# EAGLE board Pixelkit_2side (EAGLE 5.08)
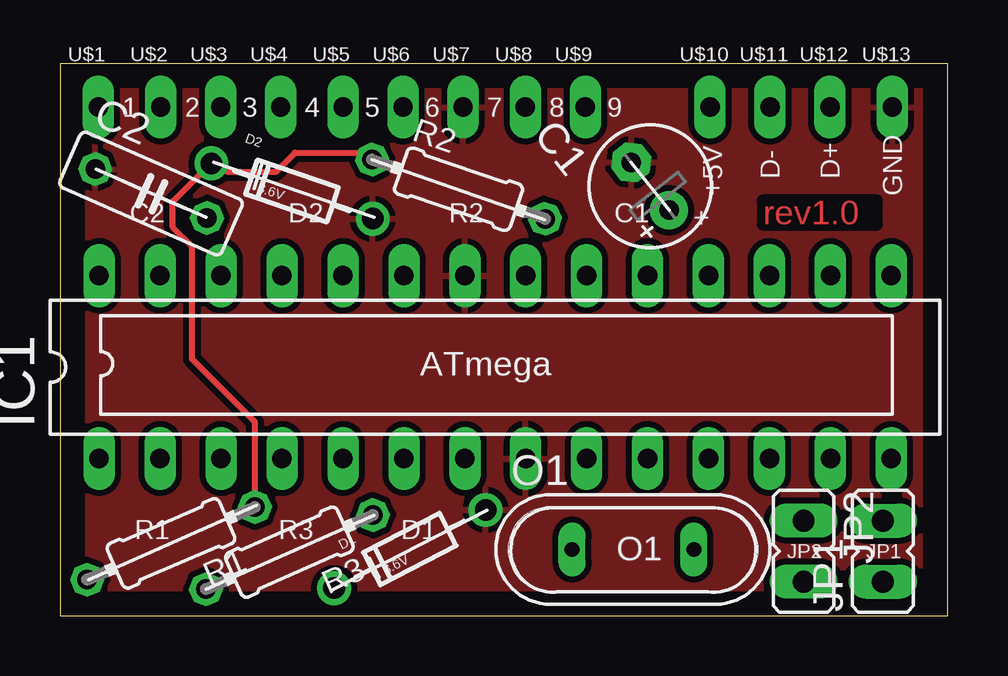
[diagram p0: board, top side]
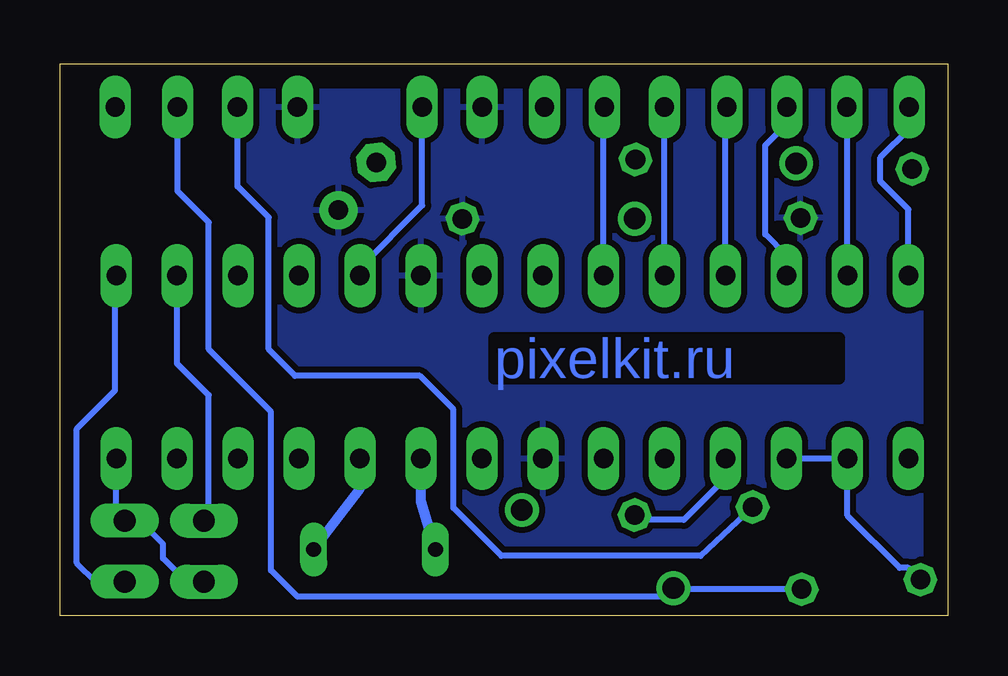
[diagram p1: board, bottom side, seen from below]

Size 37 x 23 mm. Coordinates in mm from the lower left corner, seen from the top.
Outline: 0,0 37,0 37,23 0,23 0,0
Copper layers (1*16): Top 0.035mm / dielectric 1.5mm / Bottom 0.035mm
Design rules "default": minimum track width 10mil, minimum drill 24mil, track to track 8mil, track to pad 8mil, pad to pad 8mil, via to via 8mil, smd to smd 8mil, copper to edge 40mil, drill to drill 8mil, minimum pad ring 10mil, minimum via ring 8mil, stop-mask expansion 4mil, vias tented up to drill 0mil, thermal gap 10mil
Net classes: 0 default: width 0.25 mm, clearance 0.125 mm; 1 power line: width 0.5 mm, clearance 0.25 mm

## Footprints (pad centres in the part's own frame; a part is rotated, then mirrored left to right if it is on the bottom)
E2,5-5 = drill 0.813 pad 1.6 round: + -1.27,0 | drill 0.813 pad 1.6 octagon: - 1.27,0
C050-025X075 = drill 0.813 octagon: 1 -2.54,0; 2 2.54,0
DIODE-ZENER = drill 0.9 round: P$1 -3.556,0; P$2 3.556,0
DIL28-3 = drill 0.813 long: 1 -16.51,-3.81; 2 -13.97,-3.81; 3 -11.43,-3.81; 4 -8.89,-3.81; 5 -6.35,-3.81; 6 -3.81,-3.81; 7 -1.27,-3.81; 8 1.27,-3.81; 9 3.81,-3.81; 10 6.35,-3.81; 11 8.89,-3.81; 12 11.43,-3.81; 13 13.97,-3.81; 14 16.51,-3.81; 15 16.51,3.81; 16 13.97,3.81; 17 11.43,3.81; 18 8.89,3.81; 19 6.35,3.81; 20 3.81,3.81; 21 1.27,3.81; 22 -1.27,3.81; 23 -3.81,3.81; 24 -6.35,3.81; 25 -8.89,3.81; 26 -11.43,3.81; 27 -13.97,3.81; 28 -16.51,3.81
JP1 = drill 0.914 long: 1 0,-1.27; 2 0,1.27
QS = drill 0.61 long: 1 -2.54,0; 2 2.54,0
0204/7 = drill 0.813 octagon: 1 -3.81,0; 2 3.81,0
PERF_PAD = drill 0.8 long: PP1 0,0

## Placement (x,y rotation side)
C1  10uF  [E2,5-5]  24.6,17.9 128.3 top
C2  0.1uF  [C050-025X075]  3.8,17.6 336.4 top
D1  3.6V  [DIODE-ZENER]  14.59,2.79 27.3 top
D2  3.6V  [DIODE-ZENER]  9.68,17.7 341.1 top
IC1  MEGA8-P  [DIL28-3]  18.14,10.37 0 top
JP1  [JP1]  34.3,2.7 0 top
JP2  [JP1]  31,2.7 180 top
O1  12 Mhz  [QS]  23.89,2.77 0 top
R1  68  [0204/7]  4.63,3.02 203.4 top
R2  1.5K  [0204/7]  16.61,17.78 341.1 top
R3  68  [0204/7]  9.56,2.65 203.9 top
U$1  PERFECT_PAD  [PERF_PAD]  1.6,21.2 0 top
U$2  PERFECT_PAD  [PERF_PAD]  4.2,21.2 0 top
U$3  PERFECT_PAD  [PERF_PAD]  6.7,21.2 0 top
U$4  PERFECT_PAD  [PERF_PAD]  9.2,21.2 0 top
U$5  PERFECT_PAD  [PERF_PAD]  11.8,21.2 0 top
U$6  PERFECT_PAD  [PERF_PAD]  14.3,21.2 0 top
U$7  PERFECT_PAD  [PERF_PAD]  16.8,21.2 0 top
U$8  PERFECT_PAD  [PERF_PAD]  19.4,21.2 0 top
U$9  PERFECT_PAD  [PERF_PAD]  21.9,21.2 0 top
U$10  PERFECT_PAD  [PERF_PAD]  27.1,21.2 0 top
U$11  PERFECT_PAD  [PERF_PAD]  29.6,21.2 0 top
U$12  PERFECT_PAD  [PERF_PAD]  32.1,21.2 0 top
U$13  PERFECT_PAD  [PERF_PAD]  34.7,21.2 0 top

## Library data of the parts
C1 C2 = rcl
D1 D2 = SparkFun
IC1 = atmel
JP1 JP2 = jumper
O1 = special
R1-R3 = resistor
U$1-U$13 = perfectPAD

## Nets
+5V [power line]: C1.+ C2.2 IC1.7 IC1.20 R2.2 U$8.PP1 U$10.PP1
CLOCK: IC1.28 U$1.PP1
DATA: IC1.26 U$3.PP1
GND [power line]: C1.- C2.1 D1.P$2 D2.P$2 IC1.8 IC1.22 U$7.PP1 U$13.PP1
LATCH: IC1.27 U$2.PP1
N$1: IC1.2 IC1.3 R1.2
N$2: D2.P$1 R1.1 R2.1 U$11.PP1
N$3: IC1.4 R3.1
N$4: IC1.10 O1.2
N$5: D1.P$1 R3.2 U$12.PP1
N$6: IC1.14 JP1.2 JP2.2
N$7: IC1.15 JP1.1
N$8: IC1.16 JP2.1
N$9: IC1.25 U$4.PP1
N$10: IC1.24 U$5.PP1
N$11: IC1.23 U$6.PP1
N&12: IC1.9 O1.1
SCK: IC1.19 U$9.PP1

## Tracks (layer width: path | path; a pad name or v marks a point on that pad's centre or on a via)
+5V
  pour Bottom: 0.3,22.7 36.7,22.7 36.7,0 0.3,0
CLOCK
  Bottom 0.254: U$1.PP1 1.6,20.3 2.8,19.1 2.8,18.1 1.64,16.93 IC1.28
DATA
  Bottom 0.254: IC1.26 6.71,15.02 7.6,15.9 7.6,19.6 6.7,20.5 U$3.PP1
GND
  pour Top: 0.4,22.7 36.8,22.7 36.8,0.2 0.4,0.2
LATCH
  Bottom 0.254: 4.2,20 U$2.PP1 4.17,21.18 IC1.27
N$1
  Bottom 0.254: IC1.3 IC1.2 4.17,4.17 2,2 1.63,2 R1.2
N$2
  Top 0.254: R1.1 8.13,8.07 5.5,10.7 5.5,15.4 4.7,16.2 4.7,17.25 D2.P$1 6.64,18.86 7,18.5 9,18.5 9.8,19.3 12.72,19.3 R2.1
  Bottom 0.254: U$11.PP1 29.6,17.9 28.3,16.6 28.3,11.1 27.2,10 22,10 20.6,8.6 20.6,4.5 18.6,2.5 10.3,2.5 R1.1
N$3
  Bottom 0.254: IC1.4 9.26,5.75 11,4 12.85,4 R3.1
N$4
  Bottom 0.406: IC1.10 24.5,5.3 O1.2
N$5
  Bottom 0.254: R3.2 11.38,1.11 D1.P$1 11.45,1.15 11.8,0.8 27.1,0.8 28.2,1.9 28.2,8.5 30.8,11.1 30.8,16.4 32.1,17.7 U$12.PP1
N$6
  Bottom 0.254: IC1.14 34.66,4.33 JP1.2 33.67,3.97 32.7,3 32.7,2.4 32,1.7 31.27,1.7 JP2.2
N$7
  Bottom 0.254: JP1.1 34.33,1.4 35.5,1.4 36.3,2.2 36.3,7.8 34.7,9.4 34.7,14.13 IC1.15
N$8
  Bottom 0.254: IC1.16 32.12,10.52 30.8,9.2 30.8,4.17 JP2.1
N$9
  Bottom 0.254: IC1.25 9.26,21.14 U$4.PP1
N$10
  Bottom 0.254: IC1.24 U$5.PP1
N$11
  Bottom 0.254: IC1.23 14.34,21.16 U$6.PP1
N&12
  Bottom 0.406: IC1.9 21.95,4.78 O1.1
SCK
  Bottom 0.254: IC1.19 24.5,14.51 21.9,17.1 U$9.PP1

## Text on the board
Top: rev1.0
Bottom: pixelkit.ru
_tsilk: 1 | 2 | 3 | 4 | 5 | 6 | 7 | 8 | 9 | +5V | D- | D+ | GND | C2 | D2 | R2 | C1 | + | ATmega | R1 | R3 | D1 | O1 | JP2 | JP1